# EAGLE board Grove - Time of Flight Distance Sensor(VL53L0X) (EAGLE 6.4)
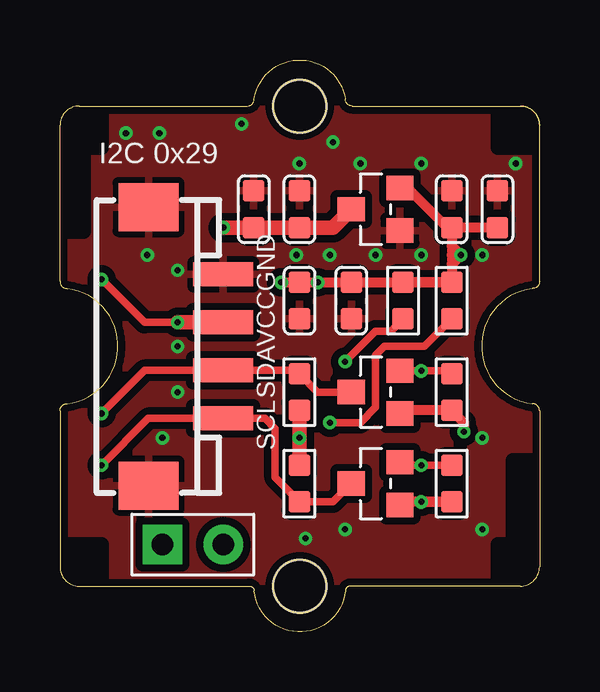
[diagram p0: board, top side]
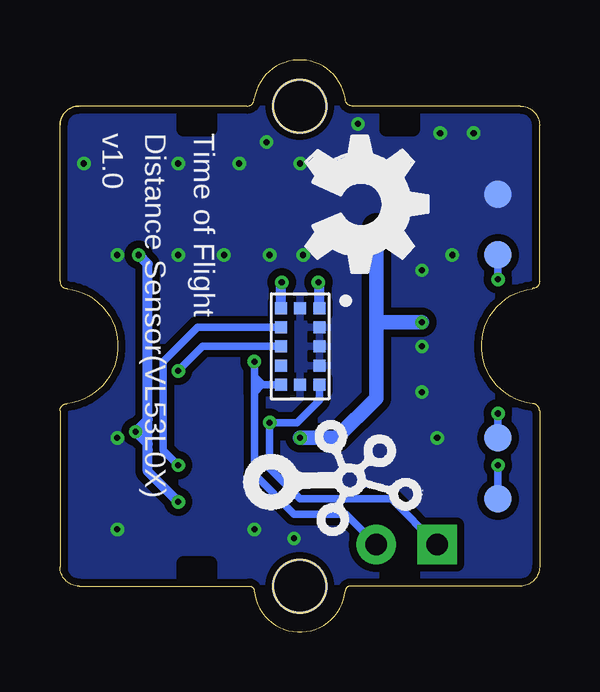
[diagram p1: board, bottom side, seen from below]

Size 20 x 23.83 mm. Coordinates in mm from the lower left corner, seen from the top.
Copper layers (1*16): Top 0.035mm / dielectric 1.5mm / Bottom 0.035mm
Design rules "SeeedStudio_2layer_DRU_no_angle_20140221 *": minimum track width 6mil, minimum drill 10mil, track to track 6mil, track to pad 6mil, pad to pad 6mil, via to via 6mil, smd to smd 0mil, copper to edge 10mil, drill to drill 10mil, minimum pad ring 10mil, minimum via ring 6mil, stop-mask expansion 2mil, vias tented up to drill 25mil, thermal gap 10mil
Net classes: 3 usbvcc: width 0.203 mm, drill 0.305 mm, clearance 0.203 mm

## Footprints (pad centres in the part's own frame; a part is rotated, then mirrored left to right if it is on the bottom)
C0603 = smd 0.889 x 0.889: 1 0,0.762; 2 0,-0.762
H2-2.54 = drill 0.889 pad 1.651 square: 1 0,1.27 | drill 0.889 pad 1.651: 2 0,-1.27
HW4-SMD-2.0 = smd 1 x 2.5: 1 -3,0; 2 -1,0; 3 1,0; 4 3,0 | smd 2 x 2.5: SS1 -5.8,3.123; SS2 5.8,3.123
SOT-23 = smd 1.143 x 1.016: 1 1.016,-0.889; 2 1.016,0.889; 3 -1.016,0
R0603 = smd 0.889 x 0.889: 1 0,0.762; 2 0,-0.762
TP-D45MIL = smd 1.143 x 1.143: T 0,0
SNR12-SMD-4.4X2.4X1.0MM = smd 0.5 x 0.5: 1 0.8,1.6; 2 0.8,0.8; 3 0.8,0; 4 0.8,-0.8; 5 0.8,-1.6; 6 0,-1.6; 7 -0.8,-1.6; 8 -0.8,-0.8; 9 -0.8,0; 10 -0.8,0.8; 11 -0.8,1.6; 12 0,1.6
SOT-23' = smd 1.016 x 1.143: 1 -0.889,-1.016; 2 0.889,-1.016; 3 0,1.016
GROVE-1X1-TEST-PLATFORM-TOP = hole 2.2: 9.987,0.013; -10.013,0.013

## Placement (x,y rotation side)
C1  100nF  [C0603]  8.08,17.61 0 top
C2  1uF  [C0603]  9.99,17.61 0 top
C3  100nF  [C0603]  18.24,17.61 0 top
C4  1uF  [C0603]  16.34,17.61 0 top
C5  4.7uF  [C0603]  12.15,13.8 180 top
C6  100nF  [C0603]  9.99,13.8 180 top
FR1  SEEEDSTUDIO-OPEN-SCH-FRAME  [SEEEDSTUDIO-PCB-FRAME]  -32.05,-15.16 0 top  (outside the outline)
J1  [H2-2.54]  5.54,3.64 90 top
J3  [HW4-SMD-2.0]  6.81,11.9 90 top
Q1  2N7002,215  [SOT-23]  13.16,9.99 0 top
Q2  2N7002,215  [SOT-23]  13.16,6.18 0 top
R1  10k  [R0603]  16.34,13.8 180 top
R2  10k  [R0603]  14.31,13.8 180 top
R5  4.7k  [R0603]  16.34,9.99 0 top
R6  4.7k  [R0603]  16.34,6.18 0 top
R7  4.7k  [R0603]  9.99,9.99 0 top
R8  4.7k  [R0603]  9.99,6.18 180 top
TP1  [TP-D45MIL]  1.73,5.55 0 bottom
TP2  [TP-D45MIL]  1.73,8.09 0 bottom
TP3  [TP-D45MIL]  1.73,15.71 0 bottom
TP4  [TP-D45MIL]  1.73,18.25 0 bottom
U1  VL53L0X  [SNR12-SMD-4.4X2.4X1.0MM]  9.99,11.9 0 bottom
U2  XC6206P282MR  [SOT-23']  13.16,17.61 90 top
U3  [GROVE-1X1-TEST-PLATFORM-TOP]  9.99,11.9 270 top
U$4  SEEEDSTUDIO-OPEN-SCH-FRAME  [SEEEDSTUDIO-PCB-FRAME]  -31.41,-8.17 0 top  (outside the outline)
U$6  [OSHW_FILLX200_NOTEXT]  9.73,20.66 270 bottom
U$7  [TWIGLOGO]  11.38,6.31 270 bottom

## Library data of the parts
C1-C6 Q1 Q2 R1 R2 R5-R8 U1 = Discrete-new
FR1 U3 U$4 = moudle-new
J1 J3 = Connector-new
TP1-TP4 = Discrete-new; PARTNO: DNP
U2 = IC-new
U$6 U$7 = Logo

## Nets
2V8: C3.2 C4.2 C5.2 C6.2 Q1.1 Q2.1 R1.2 R2.2 R5.2 R6.2 U1.1 U1.11 U2.2
GND: C1.1 C2.1 C3.1 C4.1 C5.1 C6.1 J3.4 J3.SS1 J3.SS2 TP4.T U1.2 U1.3 U1.4 U1.6 U1.12 U2.1
GPIO1: J1.2 R2.1 U1.7
SCL_2V8: Q2.2 R6.1 U1.10
SCL_VCC: J3.1 Q2.3 R8.1 TP1.T
SDA_2V8: Q1.2 R5.1 U1.9
SDA_VCC: J3.2 Q1.3 R7.1 TP2.T
VCC: C1.2 C2.2 J3.3 R7.2 R8.2 TP3.T U2.3
XSHUT: J1.1 R1.1 U1.5

## Tracks (layer width: path | path; a pad name or v marks a point on that pad's centre or on a via)
2V8  (via drill 0.25 pad 0.51)
  Top 0.406: R1.2 C5.2 v10.75,14.56 C6.2 v9.23,14.56 | R1.2 R2.2 | C3.2 C4.2 | C4.2 16.15,16.85 14.5,18.5 U2.2 | Q1.1 14.31,9.23 R5.2 16.85,8.72 v16.85,8.34 | Q2.1 14.31,5.42 R6.2 v15.07,5.42 | C4.2 16.34,16.09 | 16.34,16.09 16.34,15.71 | 16.34,15.71 16.34,15.32 | 16.34,15.32 R1.2 | 16.34,15.71 v16.72,15.71 | 16.34,16.09 v16.72,15.71 | 16.34,15.32 v16.72,15.71
  Bottom 0.406: U1.1 9.19,14.52 v9.23,14.56 | U1.11 10.79,14.52 v10.75,14.56 | v15.07,5.42 16.34,6.69 16.34,7.58 16.34,7.83 | 16.34,7.83 16.34,8.34 | 16.34,8.34 16.34,8.85 | 16.34,8.85 16.34,15.32 v16.72,15.71 | 16.34,8.34 v16.85,8.34 | 16.34,8.85 v16.85,8.34 | 16.34,7.83 v16.85,8.34
GND  (via drill 0.25 pad 0.51)
  other vias: 15.07,15.71 13.16,15.71 11.26,15.71 11.38,20.4 9.99,19.52 15.07,19.52 19,19.52 17.61,15.71 4.15,20.79 7.57,21.17 9.86,15.71 4.91,11.9 4.91,9.99 2.75,20.79 10.24,3.89 4.27,8.09 11.89,4.28 17.61,4.28 17.61,8.09 12.53,19.52 4.91,15.07 3.64,15.71
  pour Top (isolate 0.305): -1.44,23.96 20.15,23.71 20.15,-0.17 -1.44,-0.42
  pour Bottom (isolate 0.305): -1.44,23.96 20.15,23.71 20.15,-0.17 -1.44,-0.42
GPIO1  (via drill 0.25 pad 0.51)
  Top 0.305: R2.1 13.8,12.53 13.16,12.53 v11.89,11.26
  Bottom 0.305: 11.89,10.88 v11.89,11.26 11.89,10.63 | U1.7 11.56,10.3 | 11.59,10.3 11.82,10.3 11.89,10.37 | 11.89,10.63 11.89,10.37 | 11.89,9.99 11.89,6.56 10.24,4.91 8.08,4.91 J1.2 | 11.56,10.3 11.89,10.63 | 11.56,10.3 11.59,10.3 | 11.59,10.3 11.89,9.99 | 11.89,9.99 11.89,10.37
SCL_2V8  (via drill 0.25 pad 0.51)
  Top 0.305: R6.1 v15.07,6.94 14.31,6.94 Q2.2
  Bottom 0.305: U1.10 14.27,12.7 15.7,11.26 15.7,7.58 v15.07,6.94
SCL_VCC  (via drill 0.25 pad 0.51)
  Top 0.305: Q2.3 11.38,5.42 R8.1 8.97,6.43 8.97,8.47 8.54,8.9 J3.1 3.69,8.9 v1.73,6.94
  Bottom 0.305: v1.73,6.94 TP1.T
SDA_2V8  (via drill 0.25 pad 0.51)
  Top 0.305: Q1.2 v15.07,10.88 16.21,10.88 R5.1
  Bottom 0.305: U1.9 14.05,11.9 v15.07,10.88
SDA_VCC  (via drill 0.25 pad 0.51)
  Top 0.305: Q1.3 10.75,9.99 R7.1 9.84,10.9 J3.2 3.53,10.9 v1.73,9.1
  Bottom 0.305: v1.73,9.1 TP2.T
VCC  (via drill 0.25 pad 0.51)
  Top 0.305: v4.91,12.9 3.53,12.9 v1.73,14.69
  Top 0.61: U2.3 11.38,16.85 C2.2 C1.2 v6.81,16.85 | R8.2 v9.99,8.09 R7.2 | J3.3 v4.91,12.9
  Bottom 0.305: v1.73,14.69 TP3.T | 6.7,12.9 6.81,12.78
  Bottom 0.61: v9.99,8.09 8.46,8.09 6.81,9.74 6.81,12.78 v6.81,16.85 | v4.91,12.9 6.7,12.9
XSHUT  (via drill 0.25 pad 0.51)
  Top 0.305: R1.1 15.19,11.9 13.52,11.9 13.16,11.54 13.16,9.36 12.53,8.72 v11.26,8.72
  Bottom 0.305: U1.5 9.19,9.65 10.11,8.72 v11.26,8.72 11.26,6.82 9.99,5.55 6.18,5.55 J1.1

## Text on the board
tPlace: I2C 0x29 | GND | VCC | SDA | SCL
bPlace: Time of Flight | Distance Sensor(VL53L0X) | v1.0